# Altium PCB feeder.PcbDoc
Units mil, origin at the board's own origin, x right, y up, seen from the top; angles counter-clockwise.
Board outline 2065 x 1360 mil, 2 copper layers (Top Layer, Bottom Layer); 21 components, 23 nets, 109 pads, 21 vias.
Unrouted connection lines stored in the file: 16.
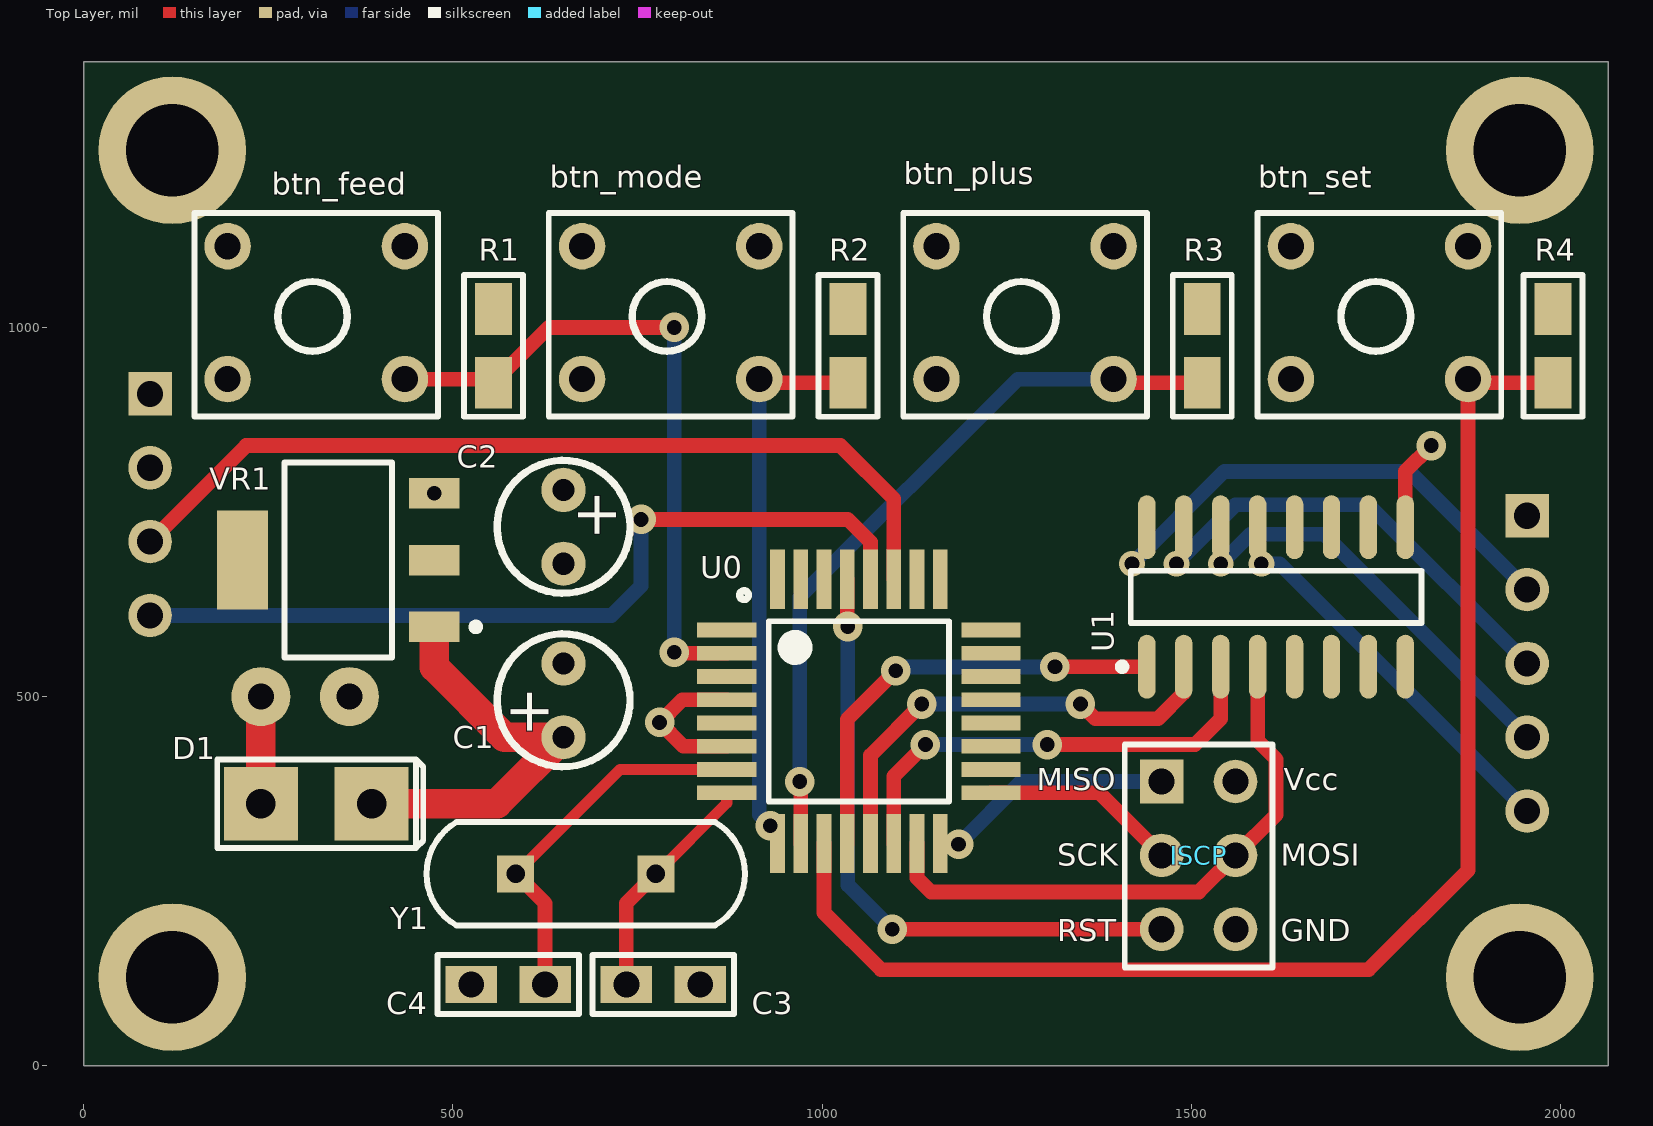
[diagram p0: Top Layer view]
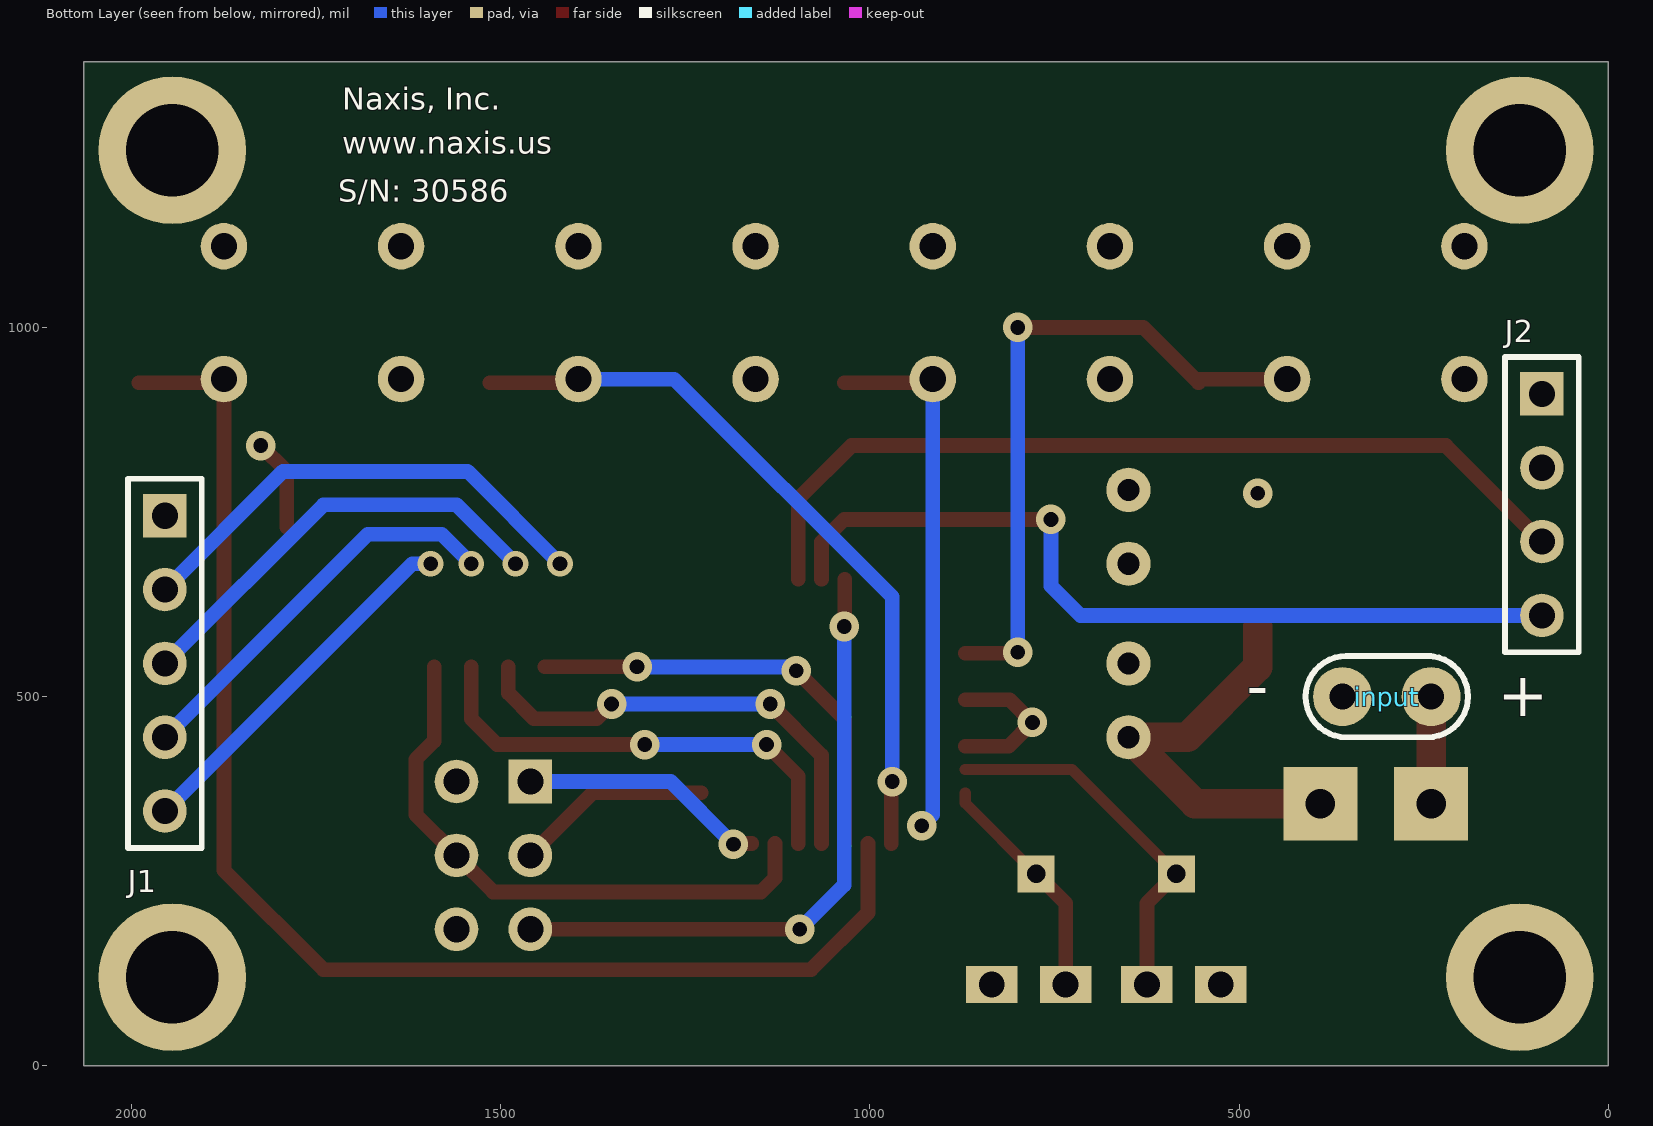
[diagram p1: Bottom Layer view, seen from below]

## Layer stack, top to bottom
Top Solder: solder mask 0.4, Solder Resist, Dk 3.5
Top Layer: signal copper 1.4
Dielectric1: dielectric 12.6, FR-4, Dk 4.8
Bottom Layer: signal copper 1.4
Bottom Solder: solder mask 0.4, Solder Resist, Dk 3.5

## Board outline
0,1360 2065,1360 2065,0 0,0 0,1360

## Design rules (kind name [scope] priority, off if disabled: settings)
Clearance [All] p1: gap=10 ignorepadtopadclearanceinfootprint=FALSE except(0: Arc-Hole Track-Hole SMDPad-Hole THPad-Hole Via-Hole Fill-Hole Poly-Hole Region-Hole Text-Hole)
PolygonConnect [All] p1: connectstyle=Relief reliefconductorwidth=10 reliefentries=4 polygonreliefangle="90 Angle" airgapwidth=10
RoutingVias [All] p1: holewidth=28 width=50 viastyle="Through Hole" minholewidth=28 minwidth=50 maxholewidth=28 maxwidth=50
SilkToSolderMaskClearance SilkscreenOverComponentPads [IsPad] p1: minsilkscreentomaskgap=10 clearancetoexposedcopper=TRUE
SolderMaskExpansion [All] p1: expansion=4
Width [All] p1: maxlimit=100 minlimit=5 preferedwidth=20 minimp=50.000000 maximp=50.000000 favimp=50.000000
29 further rules are at their usual default settings.

## Components (designator, comment, footprint, x,y, rotation, side; value= is the part's Value field where it differs from the comment)
btn_feed "SW-PB" BUTTON 435,930 r180 top
btn_mode "SW-PB" BUTTON 915,930 r180 top
btn_plus "SW-PB" BUTTON 1395,930 r180 top
btn_set "SW-PB" BUTTON 1875,930 r180 top
C1 "Cap Pol1" C100_round 650,445 r90 top value=10uF
C2 "Cap" C100_round 650,780 r270 top value=.1uF
C3 "Cap" Cap1206_throu 785,110 r180 top value=15pF
C4 "Cap" Cap1206_throu 575,110 r0 top value=15pF
D1 "Diode" Diode_smd_throug 240,355 r0 top
input "POWER IN" C_120x100 240,500 r0 bottom
ISCP "Header 3X2" ISP_6pin_2 1460,385 r270 top
J1 "SteperMotor_Conn" HDR1X5 1955,745 r270 bottom
J2 "LCD_Conn" HDR1X4 90,910 r270 bottom
R1 "Res1" Cap1206_new 555,975 r90 top value=10K
R2 "Res1" Cap1206_new 1035,975 r90 top value=10K
R3 "Res1" Cap1206_new 1515,975 r90 top value=10K
R4 "Res1" Cap1206_new 1990,975 r90 top value=10K
U0 "ATmega328P-AU" TQFP_32_Atmega8a 1050,480 r0 top
U1 "ULN2003" SOIC16 1615,635 r90 top
VR1 "7805" SOT-223B 340,690 r0 top
Y1 "XTAL" XTAL-2 775,260 r180 top

## Footprints (in the part's own frame and the unit in brackets; to place one, negate y for a bottom-side part, rotate by r counter-clockwise, add the part's x,y. Pads: shape width x height; smd on the part's side, far side on the other; paste and mask are expansions set on the pad)
BUTTON [mil]
  round 63 hole 35.43: 1(0,0) 2(240,-180) 3(0,-180) 4(240,0)
  silkscreen extent -45,-225 285,50, body extent 40,-175 200,5, height 220
C100_round [mil]
  round 60 hole 30: 1(0,0) 2(100,0)
  silkscreen extent -40,-90 140,90
C_120x100 [mil] "Capacitor"
  round 80 hole 35: 1(0,0) 2(120,0)
  silkscreen extent -50,-55 170,55
Cap1206_new [mil]
  rect 70x50 smd: 1(-50,0) 2(50,0)
  silkscreen extent -96,-40 96,40, body extent -67,-35 67,35, height 51
Cap1206_throu [mil]
  rect 70x50 hole 35: 1(-50,0) 2(50,0)
  silkscreen extent -96,-40 96,40, body extent -67,-35 67,35, height 51
Diode_smd_throug [mil]
  rect 100x100 hole 40: 1(0,0) 2(150,0)
  silkscreen extent -59,-60 220,60, body extent 8,-53 142,53, height 51
HDR1X4 [mm] "Connector; Header; 4 Position"
  rect 1.5x1.5 hole 0.9: 1(0,0)
  round 1.5 hole 0.9: 2(2.54,0) 3(5.08,0) 4(7.62,0)
  silkscreen extent -1.27,-1.27 8.89,1.27
HDR1X5 [mm] "Connector; Header; 5 Position"
  rect 1.5x1.5 hole 0.9: 1(0,0)
  round 1.5 hole 0.9: 2(2.54,0) 3(5.08,0) 4(7.62,0) 5(10.16,0)
  silkscreen extent -1.27,-1.27 11.43,1.27
ISP_6pin_2 [mm]
  rect 1.5x1.5 hole 0.9: 1(0,0)
  round 1.5 hole 0.9: 2(0,2.54) 3(2.54,0) 4(2.54,2.54) 5(5.08,0) 6(5.08,2.54)
  silkscreen extent -1.27,-1.27 6.4,3.81
SOIC16 [mm]
  oval 2.2x0.6 smd: 1(-2.4,4.445) 2(-2.4,3.175) 3(-2.4,1.905) 4(-2.4,0.635) 5(-2.4,-0.635) 6(-2.4,-1.905) 7(-2.4,-3.175) 8(-2.4,-4.445) 9(2.4,-4.445) 10(2.4,-3.175) 11(2.4,-1.905) 12(2.4,-0.635) 13(2.4,0.635) 14(2.4,1.905) 15(2.4,3.175) 16(2.4,4.445)
  silkscreen extent -2.52,-5 0.9,5.42, body extent -2,-5 2,5, height 1.75
SOT-223B [mm] "FAR-1112S"
  rect 1.75x1.05 smd: 1(3.427,-2.427) 2(3.427,-0.127) 3(3.427,2.173)
  rect 1.75x3.4 smd: 4(-3.173,-0.127)
  silkscreen extent -1.72,-3.48 4.98,3.22
TQFP_32_Atmega8a [mil]
  rect 80x20 smd: 1(-179.02,110.24) 2(-179.02,78.74) 3(-179.02,47.24) 4(-179.02,15.75) 5(-179.02,-15.75) 6(-179.02,-47.24) 7(-179.02,-78.74) 8(-179.02,-110.24) 17(179.02,-110.24) 18(179.02,-78.74) 19(179.02,-47.24) 20(179.02,-15.75) 21(179.02,15.75) 22(179.02,47.24) 23(179.02,78.74) 24(179.02,110.24)
  rect 20x80 smd: 9(-110.24,-179.02) 10(-78.74,-179.02) 11(-47.24,-179.02) 12(-15.75,-179.02) 13(15.75,-179.02) 14(47.24,-179.02) 15(78.74,-179.02) 16(110.24,-179.02) 25(110.24,179.02) 26(78.74,179.02) 27(47.24,179.02) 28(15.75,179.02) 29(-15.75,179.02) 30(-47.24,179.02) 31(-78.74,179.02) 32(-110.24,179.02)
  silkscreen extent -162,-122 122,163, body extent -122,-122 122,122, height 104
XTAL-2 [mil]
  rect 50x50 hole 25: 1(0,0) 2(190,0)
  silkscreen extent -121,-70 311,70

## Part data
btn_feed btn_mode btn_plus btn_set: "Switch", LatestRevisionDate=17-Jul-2002, LatestRevisionNote="Re-released for DXP Platform.", PackageDescription="Switch; 2 Leads", PackageReference=SPST-2, Published=24-Mar-1999, Publisher="Altium Limited"
C1: "Polarized Capacitor (Radial)", LatestRevisionDate=17-Jul-2002, LatestRevisionNote="Re-released for DXP Platform.", PackageDescription="Polarized Capacitor (Radial); 2 Leads", PackageReference=RB7.6-15, Published=8-Jun-2000, Publisher="Altium Limited"
C2 C3 C4: "Capacitor", LatestRevisionDate=17-Jul-2002, LatestRevisionNote="Re-released for DXP Platform.", PackageDescription="Radial Cap, Thru-Hole; 2 Leads; 0.3 in Pin Spacing", PackageReference=RAD-0.3, Published=8-Jun-2000, Publisher="Altium Limited"
D1: "Default Diode", Code_JEDEC=DO-214-AB, LatestRevisionDate=17-Jul-2002, LatestRevisionNote="Re-released for DXP Platform.", PackageDescription="DO-214-AB/SMC; 2 C-Bend Leads; Body 7.9 x 5.9 mm, inc. leads (LxW)", PackageReference=SMC, PackageVersion=Sep-1996, Published=8-Jun-2000, Publisher="Altium Limited"
input: library part "Header 2", "Header, 2-Pin", LatestRevisionDate=17-Jul-2002, LatestRevisionNote="Re-released for DXP Platform.", Publisher="Altium Limited"
ISCP: "Header, 3-Pin, Dual row", LatestRevisionDate=17-Jul-2002, LatestRevisionNote="Re-released for DXP Platform.", Publisher="Altium Limited"
J1: library part "Header 5", "Header, 5-Pin", LatestRevisionDate=17-Jul-2002, LatestRevisionNote="Re-released for DXP Platform.", Publisher="Altium Limited"
J2: library part "Header 4", "Header, 4-Pin", LatestRevisionDate=17-Jul-2002, LatestRevisionNote="Re-released for DXP Platform.", Publisher="Altium Limited"
R1 R2 R3 R4: "Resistor", LatestRevisionDate=17-Jul-2002, LatestRevisionNote="Re-released for DXP Platform.", PackageDescription="Axial Device, Thru-Hole; 2 Leads; 0.3 in Pin Spacing", PackageReference=AXIAL-0.3, Published=8-Jun-2000, Publisher="Altium Limited"
U0: "8-bit AVR Microcontroller, 32KB Flash, 1KB EEPROM, 2KB SRAM, 32-pin TQFP, Industrial Grade (-40°C to 85°C)", Supplier Part Number 1=ATMEGA328P-AU-ND, Code_JEDEC=MS-026-ABA, ComponentLink1Description="Manufacturer Link", ComponentLink1URL=http://www.atmel.com/products/avr/default.asp?, ComponentLink2Description="ATmega48A/48PA/88A/88PA/168A/168PA/328/328P Datasheet", ComponentLink2URL=http://www.atmel.com/dyn/resources/prod_documents/8271.pdf, ComponentLink3Description="ATmega48A/48PA/88A/88PA/168A/168PA/328/328P Summary", ComponentLink3URL=http://www.atmel.com/dyn/resources/prod_documents/8271S.pdf, ComponentLink4Description="Atmel.com Home", ComponentLink4URL=http://www.atmel.com, DatasheetVersion="revA, Jan-2010", PackageDescription="32-Lead, 7x7x1.0 mm Body, 0.8mm Lead Pitch, Thin Profile Plastic Quad Flat Package (TQFP)", PackageReference=32A, PackageVersion="revB, Oct-2001", Published=1-Apr-2010, Publisher="Altium Limited", Supplier 1=Digi-Key, Supplier 2=Farnell, Supplier 3=Mouser, Supplier Part Number 2=1715486, Supplier Part Number 3=556-ATMEGA328P-AU
VR1: library part "Volt Reg", "Voltage Regulator", LatestRevisionDate=29-May-2009, LatestRevisionNote="IPC-7351 Footprint Added.", PackageDescription="3-Pin Transistor Outline Package 2.54 mm Pitch, 15.1 mm Lead Span", PackageReference=D2PAK, Published=24-Mar-1999, Publisher="Altium Limited"
Y1: "Crystal Oscillator", LatestRevisionDate=17-Jul-2002, LatestRevisionNote="Re-released for DXP Platform.", PackageDescription="Crystal, Thru-Hole; 2 Leads; Body 3.1 x 8.2 mm (Dia.xH)", PackageReference=R38, Published=8-Jun-2000, Publisher="Altium Limited"

## Free pads (board coordinates)
  round 200 hole 125: 1(120,120) 2(120,1240) 3(1945,1240) 4(1945,120)

## Via types
v1: diameter 40, hole 20, Top Layer to Bottom Layer, 17 vias
v2: diameter 35, hole 20, Top Layer to Bottom Layer, 4 vias

## Nets (pads, with @x,y where several pads share a name; then routed paths per layer and width w, separated by ;. In a path a pad name is that pad's centre, name@x,y a point inside that pad or via, vN(x,y) a via of type N, cw(c..) or ccw(c..) an arc to the next point about the centre after c; other vN are vias at no path point)
GND: C1.2 C2.2 C3.1 C4.1 input.2 ISCP.6 J2.1 R1.2 R2.2 R3.2 R4.2 U0.3 U0.5 U0.21 U1.8 VR1.2 VR1.4
IN1: U0.12 U1.1 | length 607.8
  Top Layer w20: U0.12 1034.25,469.25 v1(1100,535) v1@1105,540 ; v1(1315.51,540.51) U1.1
  Bottom Layer w20: v1@1100,540 v1@1315,540
IN2: U0.13 U1.2 | length 631
  Top Layer w20: U0.13 1065.75,420.75 v1(1135,490) ; v1(1350,490) 1370,470 1455,470 1490,505 U1.2
  Bottom Layer w20: v1(1135,490) v1(1350,490)
IN3: U0.14 U1.3 | length 636.7
  Top Layer w20: U0.14 1097.24,392.24 v1(1140,435) ; v1(1305,435) 1505,435 1540,470 U1.3
  Bottom Layer w20: v1(1140,435) v1(1305,435)
MISO: ISCP.1 U0.16 | length 334
  Top Layer w20: U0.16 v1@1184.02,300.98
  Bottom Layer w20: v1(1185,300) 1270,385 ISCP.1
MOSI/IN4: ISCP.4 U0.15 U1.4 | length 795
  Top Layer w20: U0.15 1128.74,254.2 1147.46,235.47 1510.47,235.47 ISCP.4 1615,340 1615,415 1590,440 U1.4
NetC1_1: C1.1 D1.2 VR1.1 | length 566.1
  Top Layer w40: D1.2 560,355 C1.1 570,445 474.92,540.08 VR1.1
NetC3_2: C3.2 U0.8 Y1.1 | length 316.1
  Top Layer w15: Y1.1 870.98,355.98 U0.8
  Top Layer w20: C3.2 735,220 Y1.1
NetC4_2: C4.2 U0.7 Y1.2 | length 511.1
  Top Layer w15: Y1.2 726.26,401.26 U0.7
  Top Layer w20: Y1.2 625,220 C4.2
NetD1_1: D1.1 input.1 | length 145
  Top Layer w40: D1.1 input.1
NETFEED: btn_feed.1 R1.1 U0.2 | length 912.6
  Top Layer w20: btn_feed.1 555,930 R1.1 630,1000 v1(800,1000) ; v1(800,560) 801.26,558.74 U0.2
  Bottom Layer w20: v1(800,560) v1(800,1000)
NetJ1_2: J1.2 U1.16 | length 653.1
  Bottom Layer w20: v2(1420,680) 1545,805 1795,805 J1.2
NetJ1_3: J1.3 U1.15 | length 597.2
  Bottom Layer w20: v2(1480,680) 1560,760 1740,760 J1.3
NetJ1_4: J1.4 U1.14 | length 545.5
  Bottom Layer w20: v2(1540,680) 1580,720 1680,720 J1.4
NetJ1_5: J1.5 U1.13 | length 498.8
  Bottom Layer w20: v2(1595,680) 1620,680 J1.5
NETMODE: btn_mode.1 R2.1 U0.9 | length 753.3
  Top Layer w20: btn_mode.1@905,930 905,920 910,925 R2.1
  Bottom Layer w20: btn_mode.1 915,340 v1(930,325)
NETPLUS: btn_plus.1 R3.1 U0.10 | length 1068.6
  Top Layer w20: U0.10 v1@971.26,385 ; btn_plus.1@1385,930 1375,930 1395,910 1395,925 R3.1
  Bottom Layer w20: v1(970,385) 970,635 1265,930 btn_plus.1 ; btn_plus.1@1385,925 btn_plus.1@1395,915
NETSET: btn_set.1 R4.1 U0.11 | length 1836
  Top Layer w20: U0.11 1002.76,207.24 1080,130 1740,130 1875,265 btn_set.1 1880,925 R4.1
RESET: ISCP.5 U0.29 | length 863.1
  Top Layer w20: v1@1034.25,595.75 U0.29 ; v1(1095,185) ISCP.5
  Bottom Layer w20: v1(1035,595) 1035,245 v1(1095,185)
SCK: ISCP.3 U0.17 | length 266.1
  Top Layer w20: U0.17 1375.24,369.76 ISCP.3
SCL: J2.4 U0.28 | length 1145.3
  Top Layer w20: v1(755,740) 1035,740 1065.75,709.25 U0.28
  Bottom Layer w20: J2.4 715,610 755,650 v1(755,740)
SDA: J2.3 U0.27 | length 1199.8
  Top Layer w20: J2.3 220,840 1025,840 1097.24,767.76 U0.27
VCC: btn_feed.2 btn_mode.2 btn_plus.2 btn_set.2 C2.1 ISCP.2 J1.1 J2.2 U0.4 U0.6 U1.9 VR1.3 | length 333.1
  Top Layer w20: U0.6 812.24,432.76 v1(780,465) 810.75,495.75 U0.4 ; U1.9 1790,805 v1(1825,840)
  other v1: 474.92,775.55
pads on no net: btn_feed.3 btn_feed.4 btn_mode.3 btn_mode.4 btn_plus.3 btn_plus.4 btn_set.3 btn_set.4 U0.1 U0.18 U0.19 U0.20 U0.22 U0.23 U0.24 U0.25 U0.26 U0.30 U0.31 U0.32 U1.5 U1.6 U1.7 U1.10 U1.11 U1.12

## Other copper
Top Layer:
  text "Note: El diodo D1 esta corregido. Solo necesita para estar listo para rehacer el GND y el VCC" at -270,1425 h30

## Silkscreen, mask and mechanical layers (free items; w line width, h text height)
Bottom Overlay:
  text "Naxis, Inc." at 1715,1295 h30
  text "www.naxis.us" at 1715,1235 h30
  text "S/N: 30586" at 1720,1170 h30
  text "-" at 490,530 h60 r180
  text "+" at 150,525 h60 r180
Mechanical 1:
  the board outline again, w5

## Text inside footprints (layer, text, board x,y; h text height)
C1: Top Overlay "+" at 630,445 h60 r90
C2: Top Overlay "+" at 670,780 h60 r270
ISCP: Top Overlay "MISO" at 1290.71,373.19 h30; Top Overlay "SCK" at 1318.27,270.83 h30; Top Overlay "RST" at 1318.27,168.46 h30; Top Overlay "Vcc" at 1625.35,373.19 h30; Top Overlay "MOSI" at 1621.42,270.83 h30; Top Overlay "GND" at 1621.42,168.46 h30